# Altium PCB StromgPCB_v1.PcbDoc
Units mil, origin at the board's own origin, x right, y up, seen from the top; angles counter-clockwise.
Board outline 2842.39 x 3149.44 mil, 2 copper layers (Top Layer, Bottom Layer); 1 components, 39 nets, 13 pads, 0 vias.
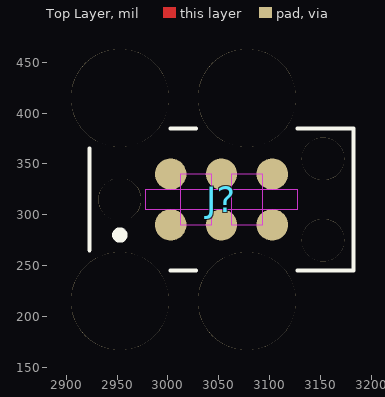
[diagram p0: Top Layer view]
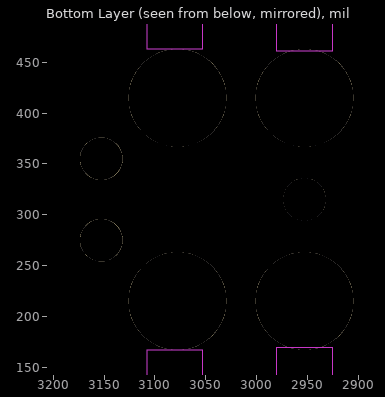
[diagram p1: Bottom Layer view, seen from below]

## Layer stack, top to bottom
Top Solder: solder mask 0.4, Solder Resist, Dk 3.5
Top Layer: signal copper 1.4
Dielectric 1: dielectric 12.6, FR-4, Dk 4.8
Bottom Layer: signal copper 1.4
Bottom Solder: solder mask 0.4, Solder Resist, Dk 3.5

## Board outline
722.13,761.72 ccw(c729.28,997.83) 850.68,795.2 1275.95,1066.5 cw(c1296.18,1032.73) 1314.2,1067.73 1333.14,1057.98 ccw(c1575.05,1575.05) 1753.2,1032.7 cw(c1937.49,471.64) 2013.33,1057.3 2425.93,1003.87 cw(c2400.65,808.65) 2475.41,990.75 2720.73,890.03 cw(c2645.97,707.93) 2798.95,584.06 cw(c1575.05,1575.05) 2798.95,2566.05 cw(c2645.97,2442.18) 2720.73,2260.07 2475.41,2159.36 cw(c2400.65,2341.46) 2425.93,2146.24 2013.33,2092.81 cw(c1937.49,2678.47) 1753.2,2117.41 ccw(c1575.05,1575.05) 1333.14,2092.13 1329.02,2090.01 cw(c1311.01,2125.02) 1290.77,2091.25 850.68,2354.91 ccw(c729.28,2152.27) 722.13,2388.38 ccw(c726.9,2230.98) 627.86,2353.42 ccw(c1257.41,1575.05) 627.86,796.69 ccw(c726.9,919.13)

## Design rules (kind name [scope] priority, off if disabled: settings)
Clearance [All] p1: gap=10 ignorepadtopadclearanceinfootprint=FALSE except(0: Arc-Hole Track-Hole SMDPad-Hole THPad-Hole Via-Hole Fill-Hole Poly-Hole Region-Hole Text-Hole)
PolygonConnect [All] p1: connectstyle=Relief reliefconductorwidth=10 reliefentries=4 polygonreliefangle="90 Angle" airgapwidth=10
RoomDefinition Modulebit_004 [InComponentClass('Modulebit_004')] p1: confinementstyle=ConfineIn formatcopy=TRUE lockcomponents=FALSE outline 2874.02,78.74 3228.35,78.74 3228.35,629.92 2874.02,629.92
RoutingVias [All] p1: holewidth=28 width=50 viastyle="Through Hole" minholewidth=28 minwidth=50 maxholewidth=28 maxwidth=50
SolderMaskExpansion [All] p1: expansion=4
Width [All] p1: maxlimit=10 minlimit=10 preferedwidth=10
30 further rules are at their usual default settings.

## Classes and differential pairs
net class ROW[1..3]: ROW1 ROW2 ROW3
net class COL[1..9]: COL1 COL2 COL3 COL4 COL5 COL6 COL7 COL8 COL9

## Components (designator, comment, footprint, x,y, rotation, side; value= is the part's Value field where it differs from the comment)
J? "Sockets & Adapters J-Link 6-pin Needle Adapter   Source:  Datasheet" "J-Link 6-pin Needle Adapter with legs" 2952.76,314.96 r0 top

## Footprints (in the part's own frame and the unit in brackets; to place one, negate y for a bottom-side part, rotate by r counter-clockwise, add the part's x,y. Pads: shape width x height; smd on the part's side, far side on the other; paste and mask are expansions set on the pad)
"J-Link 6-pin Needle Adapter with legs" [mil]
  rrect100% 30.98x30.98 smd: 1(50,-25) 2(50,25) 3(100,-25) 4(100,25) 5(150,-25) 6(150,25)
  round 96.5 hole 96.5 unplated: MH1(0,100) MH2(125,100) MH3(0,-100) MH4(125,-100)
  round 42.01 hole 42.01 unplated: MH5(0,0) MH6(200,40) MH7(200,-40)
  Top Layer keep-out region: 25,-9.5 175,-9.5 175,9.5 25,9.5
  Top Layer keep-out region: 59.5,-25 90.5,-25 90.5,25 59.5,25
  Top Layer keep-out region: 109.5,-25 140.5,-25 140.5,25 109.5,25
  Bottom Layer keep-out region: 27.24,202.74 -27.24,202.74 -27.24,145.67 27.24,145.67
  Bottom Layer keep-out region: 155,205 100.51,205 100.51,147.93 155,147.93
  Bottom Layer keep-out region: 100.51,-205 155,-205 155,-147.93 100.51,-147.93
  Bottom Layer keep-out region: -27.24,-202.74 27.24,-202.74 27.24,-145.67 -27.24,-145.67
  silkscreen extent -30,-70 230,70

## Part data
J?: library part "J-Link Connector", Manufacturer_Name="Segger Microcontroller", Manufacturer_Part_Number=8.06.16, Package=80616, DeviceSetName=8.06.16, GateName_1=G$1, Height=1mm, LibraryName=8.06.16, Mouser_Part_Number=943-8.06.16, Mouser_Price-Stock=https://www.mouser.com/Search/Refine.aspx?Keyword=943-8.06.16, SymbolName_1=8.06.16

## Nets (pads, with @x,y where several pads share a name; then routed paths per layer and width w, separated by ;. In a path a pad name is that pad's centre, name@x,y a point inside that pad or via, vN(x,y) a via of type N, cw(c..) or ccw(c..) an arc to the next point about the centre after c; other vN are vias at no path point)
ACC_INT1: 
ACC_INT2: 
BTN_A: 
BTN_B: 
COL1: 
COL2: 
COL3: 
COL4: 
COL5: 
COL6: 
COL7: 
COL8: 
COL9: 
COLR1: 
COLR2: 
COLR3: 
COLR4: 
COLR5: 
COLR6: 
COLR7: 
COLR8: 
COLR9: 
GND: J?.5
MAG_INT1: 
MISO: 
MOSI: 
P0: 
ROW1: 
ROW2: 
ROW3: 
SCK: 
SCL: 
SDA: 
SWCLK: J?.4
SWDIO_RST: J?.3
TGT_NRST: 
TGT_RXD: J?.2
TGT_TXD: 
V3.3: J?.1
pads on no net: J?.6 J?.MH1 J?.MH2 J?.MH3 J?.MH4 J?.MH5 J?.MH6 J?.MH7

## Other copper
Multi-Layer:
  the board outline again, w0.5